# Altium PCB 04壁障.PcbDoc
Units mil, origin at the board's own origin, x right, y up, seen from the top; angles counter-clockwise.
Board outline 1525.44 x 549.19 mil, 2 copper layers (Top Layer, Bottom Layer); 10 components, 12 nets, 49 pads, 14 vias.
Unrouted connection lines stored in the file: 4.
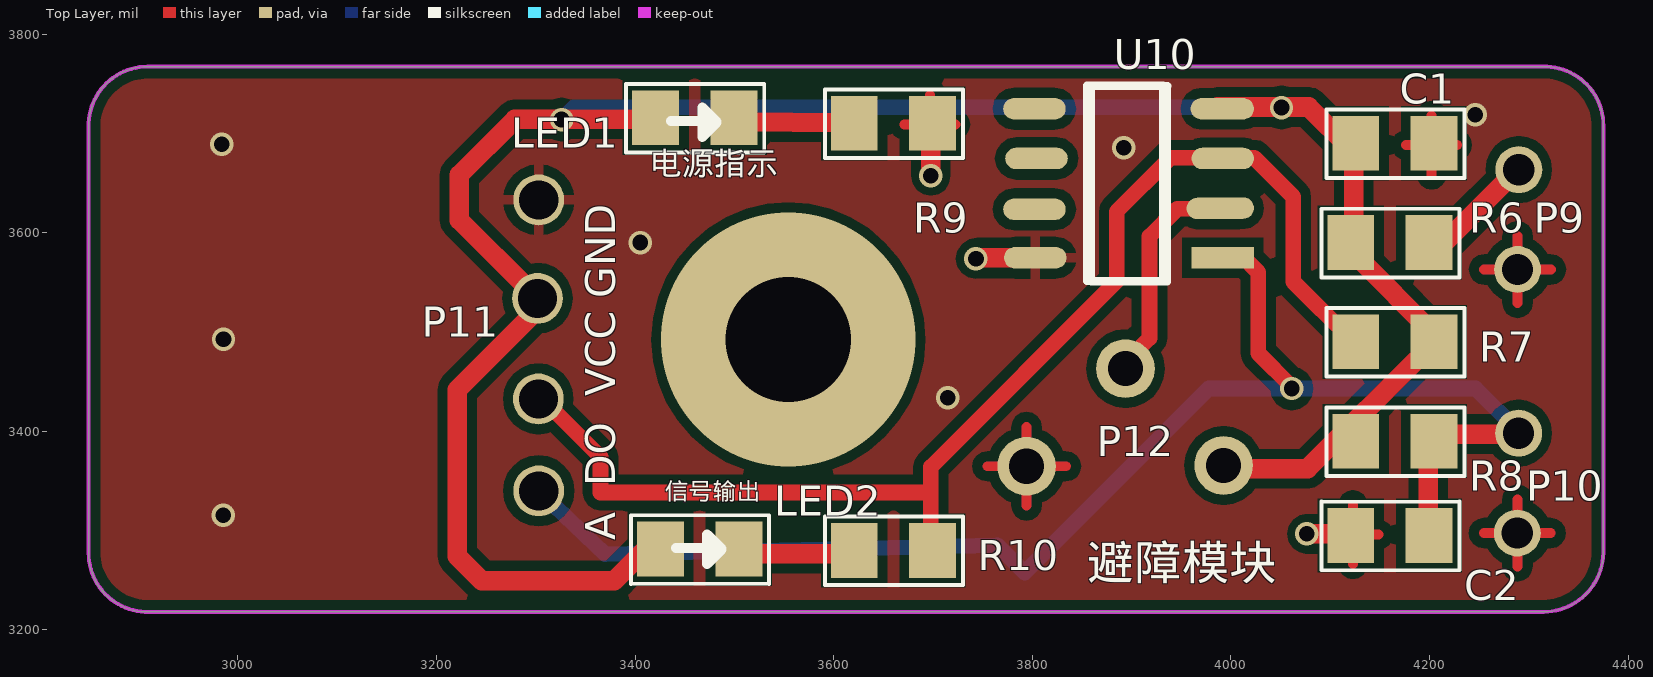
[diagram p0: Top Layer view]
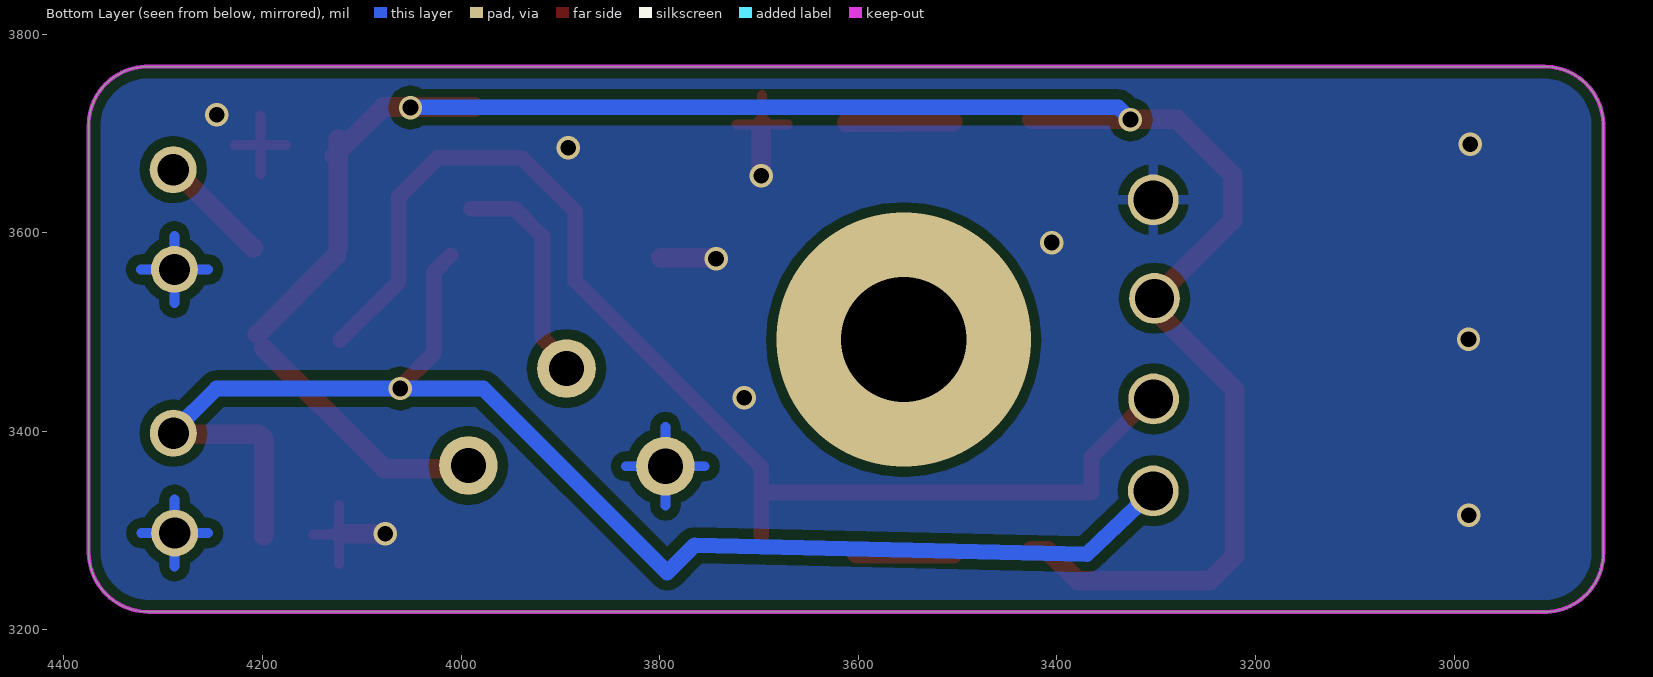
[diagram p1: Bottom Layer view, seen from below]
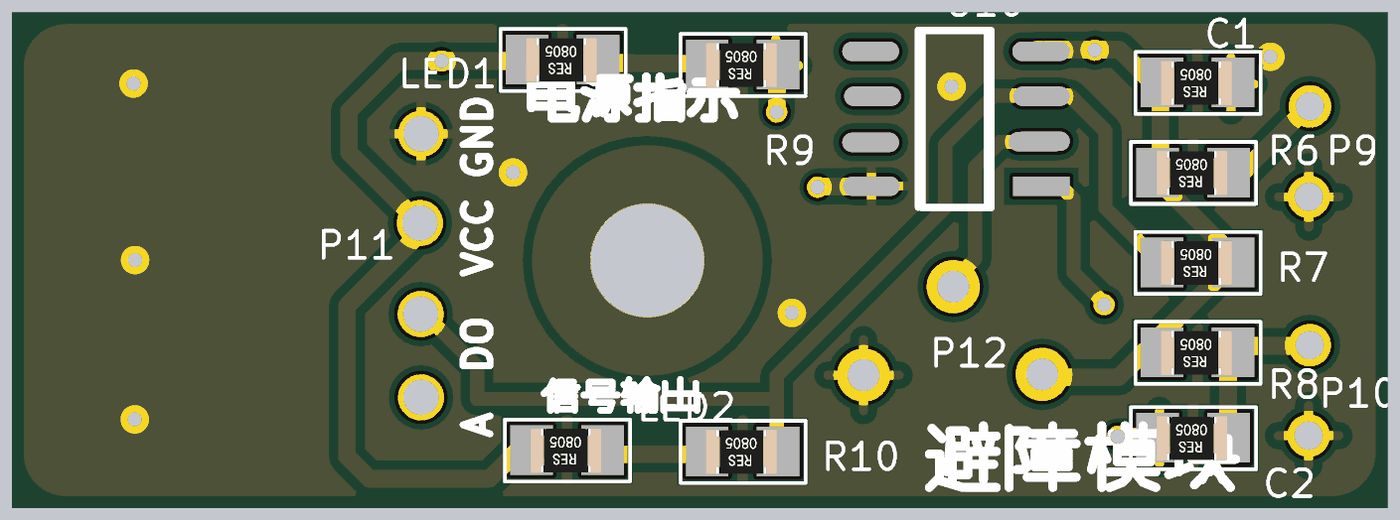
[diagram p2: 3D render of the assembled board from above, using the file's embedded part models]

## Layer stack, top to bottom
Top Solder: solder mask 0.4, Solder Resist, Dk 3.5
Top Layer: signal copper 1.4
Dielectric1: dielectric 12.6, FR-4, Dk 4.8
Bottom Layer: signal copper 1.4
Bottom Solder: solder mask 0.4, Solder Resist, Dk 3.5

## Board outline
2858.5,3246.04 2856.44,3249.63 2854.64,3253.35 2853.11,3257.19 2851.84,3261.13 2850.85,3265.14 2850.15,3269.22 2849.73,3273.34 2849.6,3277.47 2849.61,3277.06 2849.61,3708.09 2849.6,3708.11 2849.64,3710.19 2849.95,3714.31 2850.53,3718.41 2851.41,3722.45 2852.56,3726.42 2853.99,3730.3 2855.69,3734.08 2857.64,3737.72 2859.84,3741.22 2862.29,3744.56 2864.95,3747.72 2867.84,3750.69 2870.92,3753.44 2874.19,3755.98 2877.63,3758.28 2881.22,3760.34 2884.94,3762.14 2888.78,3763.67 2892.72,3764.94 2896.73,3765.93 2900.81,3766.63 2904.93,3767.05 2909.06,3767.18 2908.67,3767.19 4315.98,3767.19 4318.05,3767.15 4322.17,3766.84 4326.27,3766.25 4330.31,3765.38 4334.28,3764.23 4338.16,3762.8 4341.94,3761.1 4345.58,3759.15 4349.08,3756.95 4352.42,3754.5 4355.58,3751.83 4358.55,3748.95 4361.3,3745.87 4363.84,3742.6 4366.14,3739.16 4368.2,3735.57 4370,3731.85 4371.53,3728.01 4372.8,3724.07 4373.79,3720.06 4374.49,3715.98 4374.91,3711.86 4375.04,3707.73 4375.03,3708.04 4375.03,3278.64 4375.04,3279.42 4375.03,3277.3 4374.78,3273.06 4374.23,3268.85 4373.39,3264.69 4372.26,3260.6 4370.85,3256.6 4369.16,3252.71 4367.21,3248.94 4365,3245.32 4362.54,3241.86 4359.84,3238.58 4356.92,3235.5 4353.8,3232.63 4350.48,3229.98 4346.99,3227.57 4343.33,3225.41 4339.54,3223.51 4335.62,3221.89 4331.6,3220.53 4327.49,3219.47 4323.32,3218.69 4319.1,3218.2 4314.86,3218.01 2908.67,3218.01 2908.67,3218 2906.59,3218.05 2902.47,3218.36 2898.37,3218.95 2894.33,3219.82 2890.36,3220.97 2886.48,3222.4 2882.7,3224.1 2879.06,3226.05 2875.56,3228.25 2872.22,3230.7 2869.06,3233.36 2866.09,3236.25 2863.34,3239.33 2860.8,3242.6

## Design rules (kind name [scope] priority, off if disabled: settings)
Clearance [All] p1: gap=10 ignorepadtopadclearanceinfootprint=FALSE except(0: Arc-Hole Track-Hole SMDPad-Hole THPad-Hole Via-Hole Fill-Hole Poly-Hole Region-Hole Text-Hole)
PolygonConnect PolygonConnect_1 [ISVIA] p1: connectstyle=Direct reliefconductorwidth=10 reliefentries=4 polygonreliefangle="90 Angle" airgapwidth=10
PolygonConnect [All] p2: connectstyle=Relief reliefconductorwidth=10 reliefentries=4 polygonreliefangle="90 Angle" airgapwidth=10
RoutingVias [All] p1: holewidth=28 width=50 viastyle="Through Hole" minholewidth=28 minwidth=50 maxholewidth=28 maxwidth=50
SilkToSolderMaskClearance SilkscreenOverComponentPads [IsPad] p1: minsilkscreentomaskgap=10 clearancetoexposedcopper=TRUE
SolderMaskExpansion [All] p1: expansion=4
Width [All] p1: maxlimit=20 minlimit=10 preferedwidth=15
29 further rules are at their usual default settings.

## Components (designator, comment, footprint, x,y, rotation, side; value= is the part's Value field where it differs from the comment)
C1 "Comment" 0805-R 4165,3690 r180 top
C2 "Comment" 0805-R 4160,3295 r180 top
LED1 "1K 5%" 0805-R 3460,3715.63 r180 top
LED2 "1K 5%" 0805-R 3465,3281.36 r180 top
R6 "100R 5%" 0805-R 4160,3590 r180 top
R7 "10K 5%" 0805-R 4165,3490 r180 top
R8 "10K 5%" 0805-R 4165,3390 r180 top
R9 "1K 5%" 0805-R 3660,3710 r180 top
R10 "1K 5%" 0805-R 3660,3280 r180 top
U10 "Comment" sop8 3896.9,3649.7 r180 top

## Footprints (in the part's own frame and the unit in brackets; to place one, negate y for a bottom-side part, rotate by r counter-clockwise, add the part's x,y. Pads: shape width x height; smd on the part's side, far side on the other; paste and mask are expansions set on the pad)
0805-R [mm]
  rect 1.2x1.4 smd: 1(-1,0) 2(1,0)
  silkscreen extent -1.78,-0.86 1.75,0.89, body extent -0.97,-0.61 1.03,0.64, height 0.55
sop8 [mil]
  oval 62.99x21.65 smd paste+0 mask+4: 1(94.8,-75) 2(92.73,-24.99) 3(94.8,26.25) 4(93.98,75.01) 6(-94.8,25) 7(-94.8,-25) 8(-94.8,-75)
  rect 62.99x21.65 smd paste+0 mask+4: 5(-94.8,75)
  silkscreen extent -35,-98 42,98

## Free pads (board coordinates)
  round 47.24 hole 31.5: 0(4288.38,3297.45) 0(4288.58,3562.86) 0(4289.63,3398.04) 0(4289.83,3663.44)
  round 51.16 hole 39.37: 1(3301.66,3533.81) 1(3302.49,3432.56) 1(3302.9,3340) 1(3302.9,3632.97)
  rect 31.5x39.37 smd paste+0 mask+4: 1(3619.83,3708.86) 1(3696.71,3708.86) 1(4121.52,3490.46) 1(4123.57,3590.84) 1(4125.26,3688.03) 1(4198.4,3490.46) 1(4198.81,3394.24) 1(4199.64,3295.94) 1(4200.45,3590.84) 1(4202.13,3688.04)
  oval 62.99x21.65 smd paste+0 mask+4: 1(3986.73,3624.29) 1(3990.88,3724.7)
  round 59.06 hole 35.43: 2(3794.22,3364.7) 2(3893.8,3463.04) 2(3992.55,3365.54)

## Via types
v1: diameter 23.62, hole 15.75, Top Layer to Bottom Layer, 13 vias
v2: diameter 255.91, hole 125.98, Top Layer to Bottom Layer, 1 vias

## Nets (pads, with @x,y where several pads share a name; then routed paths per layer and width w, separated by ;. In a path a pad name is that pad's centre, name@x,y a point inside that pad or via, vN(x,y) a via of type N, cw(c..) or ccw(c..) an arc to the next point about the centre after c; other vN are vias at no path point)
$Net1: C2.1 pad.0@4289.63,3398.04 pad.1@3302.9,3340 pad.1@4198.81,3394.24 pad.1@4199.64,3295.94 R8.1 U10.5 | length 1456.5
  Top Layer w15.75: U10.5@4010.5,3577.16 4027.5,3560.16 4027.5,3478.45 4061.51,3444.44 v1@4061.93,3444.44
  Top Layer w19.68: C2.1@4198.8,3294.71 4198.8,3390 R8.1@4198.8,3393.01 ; R8.1@4203.77,3397.15 pad.0@4285.46,3397.15
  Bottom Layer w15.75: pad.1@3302.3,3330.78 3303.11,3330.79 3307.61,3335.5 3369.87,3276.06 3764.8,3285.2 3792.24,3257.76 3977.51,3443.03 v1(4061.3,3443.03) 4246.28,3443.03 4290.45,3398.86 pad.0@4291.71,3397.61
$Net3: pad.0@4289.83,3663.44 pad.1@4200.45,3590.84 R6.1 | length 107
  Top Layer w19.68: R6.1@4208.75,3584.63 4209.58,3584.63 pad.0@4284.65,3659.7
$Net4: pad.1@3986.73,3624.29 pad.2@3893.8,3463.04 U10.6 | length 230.2
  Top Layer w15.75: pad.2@3893.12,3459.99 3893.12,3468.91 3918,3493.79 3918,3596.23 3945.79,3624.03 pad.1@3990.17,3624.03
$Net5: pad.1@3302.49,3432.56 pad.1@4121.52,3490.46 R7.2 R10.1 U10.7 | length 1247.4
  Top Layer w15.75: pad.1@3294.4,3424.47 3314.76,3424.47 3365.13,3374.1 3365.13,3338.26 3695.69,3338.26 ; R10.1@3697.77,3294.71 3697.77,3363.99 3884.82,3551.05 3884.82,3621.12 3939.16,3675.46 4023.35,3675.46 4062.75,3636.06 4062.75,3550.62 R7.2@4121.65,3491.72
$Net6: 
  other v2: 3554.19,3492.19
$Net7: LED1.1 pad.1@3619.83,3708.86 R9.2 | length 106.5
  Top Layer w19.68: LED1.1@3505,3711.86 R9.2@3611.5,3710.71
$Net8: LED2.1 R10.2 | length 97.3
  Top Layer w19.68: LED2.1@3504.37,3276.76 R10.2@3601.69,3276.76
$Net9: 
$Net10: 
$Net11: 
GND: C1.1 C2.2 pad.0@4288.38,3297.45 pad.0@4288.58,3562.86 pad.1@3302.9,3632.97 pad.1@3696.71,3708.86 pad.1@4202.13,3688.04 pad.2@3794.22,3364.7 R9.1 U10.4 | length 1340.9
  Top Layer w10: 3670.96,3708.86 R9.1@3696.71,3708.86 ; 3696.71,3679.18 R9.1@3696.71,3708.86 ; 3696.71,3738.55 R9.1@3696.71,3708.86 ; R9.1@3722.46,3708.86 R9.1@3696.71,3708.86 ; 3754.69,3364.7 pad.2@3794.22,3364.7 ; 3794.22,3325.17 pad.2@3794.22,3364.7 ; 3794.22,3404.23 pad.2@3794.22,3364.7 ; 3833.74,3364.7 pad.2@3794.22,3364.7 ; C2.2@4097.02,3295.94 C2.2@4122.77,3295.94 ; 4122.77,3266.26 C2.2@4122.77,3295.94 ; 4122.77,3325.63 C2.2@4122.77,3295.94 ; 4148.51,3295.94 C2.2@4122.77,3295.94 ; 4176.38,3688.04 C1.1@4202.13,3688.04 ; 4202.13,3658.35 C1.1@4202.13,3688.04 ; 4202.13,3717.72 C1.1@4202.13,3688.04 ; C1.1@4227.88,3688.04 C1.1@4202.13,3688.04 ; 4254.76,3297.45 pad.0@4288.38,3297.45 ; 4254.96,3562.86 pad.0@4288.58,3562.86 ; 4288.38,3263.83 pad.0@4288.38,3297.45 ; 4288.38,3331.07 pad.0@4288.38,3297.45 ; 4288.58,3529.23 pad.0@4288.58,3562.86 ; 4288.58,3596.48 pad.0@4288.58,3562.86 ; 4322,3297.45 pad.0@4288.38,3297.45 ; 4322.2,3562.86 pad.0@4288.58,3562.86
  Top Layer w19.68: R9.1@3696.71,3708.86 3697.76,3707.81 v1(3697.76,3657.2) ; v1(3743.17,3573.66) 3744,3574.49 U10.4@3799,3574.49 ; v1(4076.3,3296.58) C2.2@4122.13,3296.58
  Bottom Layer w10: 3754.69,3364.7 pad.2@3794.22,3364.7 ; 3794.22,3325.17 pad.2@3794.22,3364.7 ; 3794.22,3404.23 pad.2@3794.22,3364.7 ; 3833.74,3364.7 pad.2@3794.22,3364.7 ; 4254.76,3297.45 pad.0@4288.38,3297.45 ; 4254.96,3562.86 pad.0@4288.58,3562.86 ; 4288.38,3263.83 pad.0@4288.38,3297.45 ; 4288.38,3331.07 pad.0@4288.38,3297.45 ; 4288.58,3529.23 pad.0@4288.58,3562.86 ; 4288.58,3596.48 pad.0@4288.58,3562.86 ; 4322,3297.45 pad.0@4288.38,3297.45 ; 4322.2,3562.86 pad.0@4288.58,3562.86
  other v1: 2985.05,3315.54 3714.62,3433.86 2985.46,3492.61 3405,3590 3891.92,3685.53 2983.79,3688.86 4245.88,3718.66
VCC: C1.2 LED1.2 LED2.2 pad.1@3301.66,3533.81 pad.1@3990.88,3724.7 pad.1@4123.57,3590.84 pad.1@4125.26,3688.03 pad.1@4198.4,3490.46 pad.2@3992.55,3365.54 R6.2 R7.1 R8.2 U10.8 | length 2278
  Top Layer w15.75: R6.2@4125.8,3576.75 R6.2@4125.8,3593.34
  Top Layer w19.68: LED1.2@3425,3714.03 3278.86,3714.03 3222.86,3658.03 3222.86,3612.61 3295,3540.47 3295,3515.91 3220.79,3441.7 3220.79,3274.21 3245.37,3249.63 3379.02,3249.63 3409.18,3279.78 LED2.2@3425.63,3279.78 ; pad.1@3986.44,3726.47 3991.7,3726.47 4078.1,3726.47 4120.1,3684.47 4120.9,3683.67 C1.2@4123.73,3680.85 ; pad.2@3998.47,3362.31 4077.27,3362.31 R7.1@4198.38,3483.42 ; R6.2@4123.73,3584.63 4123.73,3590 C1.2@4123.73,3680.85 ; C1.2@4123.73,3694.54 C1.2@4123.73,3680.85 ; R6.2@4125.8,3576.75 R7.1@4205.02,3497.53 ; C1.2@4127.46,3677.12 C1.2@4123.73,3680.85
  Bottom Layer w15.75: v1@3325.46,3714.69 3326.71,3714.69 3338.37,3726.36 4049.85,3726.36 v1@4050.88,3725.33
  other v1: 3325.86,3713.84 4050.88,3725.95
pads on no net: U10.1 U10.2 U10.3

## Polygon pours and split planes (outlines as drawn)
GND on Top Layer "Top Layer-No Net" (solid, pour order 1010): 2858.5,3246.04 2856.44,3249.63 2854.64,3253.35 2853.11,3257.19 2851.84,3261.13 2850.85,3265.14 2850.15,3269.22 2849.73,3273.34 2849.6,3277.47 2849.61,3277.06 2849.61,3708.09 2849.6,3708.11 2849.64,3710.19 2849.95,3714.31 2850.53,3718.41 2851.41,3722.45 2852.56,3726.42 2853.99,3730.3 2855.69,3734.08 2857.64,3737.72 2859.84,3741.22 2862.29,3744.56 2864.95,3747.72 2867.84,3750.69 2870.92,3753.44 2874.19,3755.98 2877.63,3758.28 2881.22,3760.34 2884.94,3762.14 2888.78,3763.67 2892.72,3764.94 2896.73,3765.93 2900.81,3766.63 2904.93,3767.05 2909.06,3767.18 2908.67,3767.19 4315.98,3767.19 4318.05,3767.15 4322.17,3766.84 4326.27,3766.25 4330.31,3765.38 4334.28,3764.23 4338.16,3762.8 4341.94,3761.1 4345.58,3759.15 4349.08,3756.95 4352.42,3754.5 4355.58,3751.83 4358.55,3748.95 4361.3,3745.87 4363.84,3742.6 4366.14,3739.16 4368.2,3735.57 4370,3731.85 4371.53,3728.01 4372.8,3724.07 4373.79,3720.06 4374.49,3715.98 4374.91,3711.86 4375.04,3707.73 4375.03,3708.04 4375.03,3278.64 4375.04,3279.42 4375.03,3277.3 4374.78,3273.06 4374.23,3268.85 4373.39,3264.69 4372.26,3260.6 4370.85,3256.6 4369.16,3252.71 4367.21,3248.94 4365,3245.32 4362.54,3241.86 4359.84,3238.58 4356.92,3235.5 4353.8,3232.63 4350.48,3229.98 4346.99,3227.57 4343.33,3225.41 4339.54,3223.51 4335.62,3221.89 4331.6,3220.53 4327.49,3219.47 4323.32,3218.69 4319.1,3218.2 4314.86,3218.01 2908.67,3218.01 2908.67,3218 2906.59,3218.05 2902.47,3218.36 2898.37,3218.95 2894.33,3219.82 2890.36,3220.97 2886.48,3222.4 2882.7,3224.1 2879.06,3226.05 2875.56,3228.25 2872.22,3230.7 2869.06,3233.36 2866.09,3236.25 2863.34,3239.33 2860.8,3242.6
GND on Bottom Layer "Top Layer-No Net1" (solid, pour order 1011): 2858.5,3246.04 2856.44,3249.63 2854.64,3253.35 2853.11,3257.19 2851.84,3261.13 2850.85,3265.14 2850.15,3269.22 2849.73,3273.34 2849.6,3277.47 2849.61,3277.06 2849.61,3708.09 2849.6,3708.11 2849.64,3710.19 2849.95,3714.31 2850.53,3718.41 2851.41,3722.45 2852.56,3726.42 2853.99,3730.3 2855.69,3734.08 2857.64,3737.72 2859.84,3741.22 2862.29,3744.56 2864.95,3747.72 2867.84,3750.69 2870.92,3753.44 2874.19,3755.98 2877.63,3758.28 2881.22,3760.34 2884.94,3762.14 2888.78,3763.67 2892.72,3764.94 2896.73,3765.93 2900.81,3766.63 2904.93,3767.05 2909.06,3767.18 2908.67,3767.19 4315.98,3767.19 4318.05,3767.15 4322.17,3766.84 4326.27,3766.25 4330.31,3765.38 4334.28,3764.23 4338.16,3762.8 4341.94,3761.1 4345.58,3759.15 4349.08,3756.95 4352.42,3754.5 4355.58,3751.83 4358.55,3748.95 4361.3,3745.87 4363.84,3742.6 4366.14,3739.16 4368.2,3735.57 4370,3731.85 4371.53,3728.01 4372.8,3724.07 4373.79,3720.06 4374.49,3715.98 4374.91,3711.86 4375.04,3707.73 4375.03,3708.04 4375.03,3278.64 4375.04,3279.42 4375.03,3277.3 4374.78,3273.06 4374.23,3268.85 4373.39,3264.69 4372.26,3260.6 4370.85,3256.6 4369.16,3252.71 4367.21,3248.94 4365,3245.32 4362.54,3241.86 4359.84,3238.58 4356.92,3235.5 4353.8,3232.63 4350.48,3229.98 4346.99,3227.57 4343.33,3225.41 4339.54,3223.51 4335.62,3221.89 4331.6,3220.53 4327.49,3219.47 4323.32,3218.69 4319.1,3218.2 4314.86,3218.01 2908.67,3218.01 2908.67,3218 2906.59,3218.05 2902.47,3218.36 2898.37,3218.95 2894.33,3219.82 2890.36,3220.97 2886.48,3222.4 2882.7,3224.1 2879.06,3226.05 2875.56,3228.25 2872.22,3230.7 2869.06,3233.36 2866.09,3236.25 2863.34,3239.33 2860.8,3242.6

## Keep-outs
Keep-Out Layer:
  lines w3.94: 2849.61,3277.06 2849.61,3708.09 2849.64,3710.19 2849.95,3714.31 2850.53,3718.41 2851.41,3722.45 2852.56,3726.42 2853.99,3730.3 2855.69,3734.08 2857.64,3737.72 2859.84,3741.22 2862.29,3744.56 2864.95,3747.72 2867.84,3750.69 2870.92,3753.44 2874.19,3755.98 2877.63,3758.28 2881.22,3760.34 2884.94,3762.14 2888.78,3763.67 2892.72,3764.94 2896.73,3765.93 2900.81,3766.63 2904.93,3767.05 2909.06,3767.18 ; 2849.6,3277.47 2849.73,3273.34 2850.15,3269.22 2850.85,3265.14 2851.84,3261.13 2853.11,3257.19 2854.64,3253.35 2856.44,3249.63 2858.5,3246.04 2860.8,3242.6 2863.34,3239.33 2866.09,3236.25 2869.06,3233.36 2872.22,3230.7 2875.56,3228.25 2879.06,3226.05 2882.7,3224.1 2886.48,3222.4 2890.36,3220.97 2894.33,3219.82 2898.37,3218.95 2902.47,3218.36 2906.59,3218.05 2908.67,3218 4314.86,3218.01 4319.1,3218.2 4323.32,3218.69 4327.49,3219.47 4331.6,3220.53 4335.62,3221.89 4339.54,3223.51 4343.33,3225.41 4346.99,3227.57 4350.48,3229.98 4353.8,3232.63 4356.92,3235.5 4359.84,3238.58 4362.54,3241.86 4365,3245.32 4367.21,3248.94 4369.16,3252.71 4370.85,3256.6 4372.26,3260.6 4373.39,3264.69 4374.23,3268.85 4374.78,3273.06 4375.03,3277.3 4375.04,3279.42 ; 2908.67,3767.19 4315.98,3767.19 4318.05,3767.15 4322.17,3766.84 4326.27,3766.25 4330.31,3765.38 4334.28,3764.23 4338.16,3762.8 4341.94,3761.1 4345.58,3759.15 4349.08,3756.95 4352.42,3754.5 4355.58,3751.83 4358.55,3748.95 4361.3,3745.87 4363.84,3742.6 4366.14,3739.16 4368.2,3735.57 4370,3731.85 4371.53,3728.01 4372.8,3724.07 4373.79,3720.06 4374.49,3715.98 4374.91,3711.86 4375.04,3707.73 ; 4375.03,3278.64 4375.03,3708.04

## Silkscreen, mask and mechanical layers (free items; w line width, h text height)
Top Overlay:
  lines w7.87: 3859.21,3747.71 3859.21,3550.86 3935.87,3550.86 3935.87,3747.71
  lines w8: 3859.21,3747.71 3932.96,3747.71 ; 3922.55,3747.71 3935.87,3747.71
  lines w10: 3436.28,3712.2 3464.6,3712.2 ; 3441.28,3282.2 3469.6,3282.2 ; 3468.78,3717.66 3468.78,3717.71 3468.79,3717.91 3468.81,3718.11 3468.85,3718.31 3468.9,3718.5 3468.97,3718.69 3469.05,3718.87 3469.14,3719.05 3469.24,3719.22 3469.36,3719.39 3469.48,3719.54 3469.62,3719.69 ; 3471.5,3719.8 3471.5,3718.81 3471.54,3717.75 3471.65,3716.69 3471.83,3715.64 3472.09,3714.6 3472.42,3713.59 3472.82,3712.6 3473.29,3711.65 3473.82,3710.72 3474.41,3709.84 3475.07,3709 3475.78,3708.21 3475.97,3708.02 ; 3473.78,3287.66 3473.78,3287.71 3473.79,3287.91 3473.81,3288.11 3473.85,3288.31 3473.9,3288.5 3473.97,3288.69 3474.05,3288.87 3474.14,3289.05 3474.24,3289.22 3474.36,3289.39 3474.48,3289.54 3474.62,3289.69 ; 3476.5,3289.8 3476.5,3288.81 3476.54,3287.75 3476.65,3286.69 3476.83,3285.64 3477.09,3284.6 3477.42,3283.59 3477.82,3282.6 3478.29,3281.65 3478.82,3280.72 3479.41,3279.84 3480.07,3279 3480.78,3278.21 3480.97,3278.02 ; 3482.12,3710.94 3467.53,3696.35 3467.53,3725.95 3482.18,3711.31 ; 3487.12,3280.94 3472.53,3266.35 3472.53,3295.95 3487.18,3281.31 ; 3464.62,3712.19 3464.62,3712.19 ; 3464.62,3712.19 3464.62,3712.19 ; 3464.62,3712.19 3464.62,3712.19 ; 3464.61,3712.19 3464.62,3712.19 ; 3464.61,3712.2 3464.61,3712.19 ; 3464.61,3712.2 3464.61,3712.2 ; 3464.61,3712.2 3464.61,3712.2 ; 3464.61,3712.2 3464.61,3712.2 ; 3464.6,3712.2 3464.61,3712.2 ; 3464.6,3712.2 3464.6,3712.2 ; 3464.6,3712.2 3464.6,3712.2 ; 3464.6,3712.2 3464.6,3712.2 ; 3464.61,3712.21 3464.61,3712.21 ; 3464.61,3712.21 3464.61,3712.21 ; 3464.61,3712.21 3464.61,3712.2 ; 3464.61,3712.2 3464.61,3712.2 ; 3464.61,3712.2 3464.61,3712.2 ; 3464.61,3712.2 3464.61,3712.2 ; 3464.61,3712.2 3464.61,3712.2 ; 3464.61,3712.2 3464.61,3712.19 ; 3464.61,3712.19 3464.62,3712.19 ; 3464.62,3712.19 3464.62,3712.19 ; 3464.62,3712.19 3464.62,3712.19 ; 3464.62,3712.19 3464.62,3712.19 ; 3469.61,3282.21 3469.61,3282.21 ; 3469.61,3282.21 3469.61,3282.21 ; 3469.61,3282.21 3469.61,3282.2 ; 3469.61,3282.2 3469.61,3282.2 ; 3469.61,3282.2 3469.61,3282.2 ; 3469.61,3282.2 3469.61,3282.2 ; 3469.61,3282.2 3469.61,3282.2 ; 3469.61,3282.2 3469.61,3282.19 ; 3469.61,3282.19 3469.62,3282.19 ; 3469.62,3282.19 3469.62,3282.19 ; 3469.62,3282.19 3469.62,3282.19 ; 3469.62,3282.19 3469.62,3282.19 ; 3469.62,3282.19 3469.62,3282.19 ; 3469.62,3282.19 3469.62,3282.19 ; 3469.62,3282.19 3469.62,3282.19 ; 3469.61,3282.19 3469.62,3282.19 ; 3469.61,3282.2 3469.61,3282.19 ; 3469.61,3282.2 3469.61,3282.2 ; 3469.61,3282.2 3469.61,3282.2 ; 3469.61,3282.2 3469.61,3282.2 ; 3469.6,3282.2 3469.61,3282.2 ; 3469.6,3282.2 3469.6,3282.2 ; 3469.6,3282.2 3469.6,3282.2 ; 3469.6,3282.2 3469.6,3282.2
  text "电源指示" at 3415,3650 h40
  text "P9" at 4305,3600 h30
  text "P11" at 3185,3495 h30
  text "P12" at 3865,3375 h30
  text "P10" at 4297.16,3330.2 h30
  text "信号输出" at 3430,3325 h30
  text "A  DO  VCC GND" at 3380,3290 h30 r90
  text "避障模块" at 3855,3239.33 h60